# Altium PCB CC2530-Module.PcbDoc
Units mil, origin at the board's own origin, x right, y up, seen from the top; angles counter-clockwise.
Board outline 1300 x 1295 mil, 2 copper layers (Top Layer, Bottom Layer); 12 components, 30 nets, 94 pads, 20 vias.
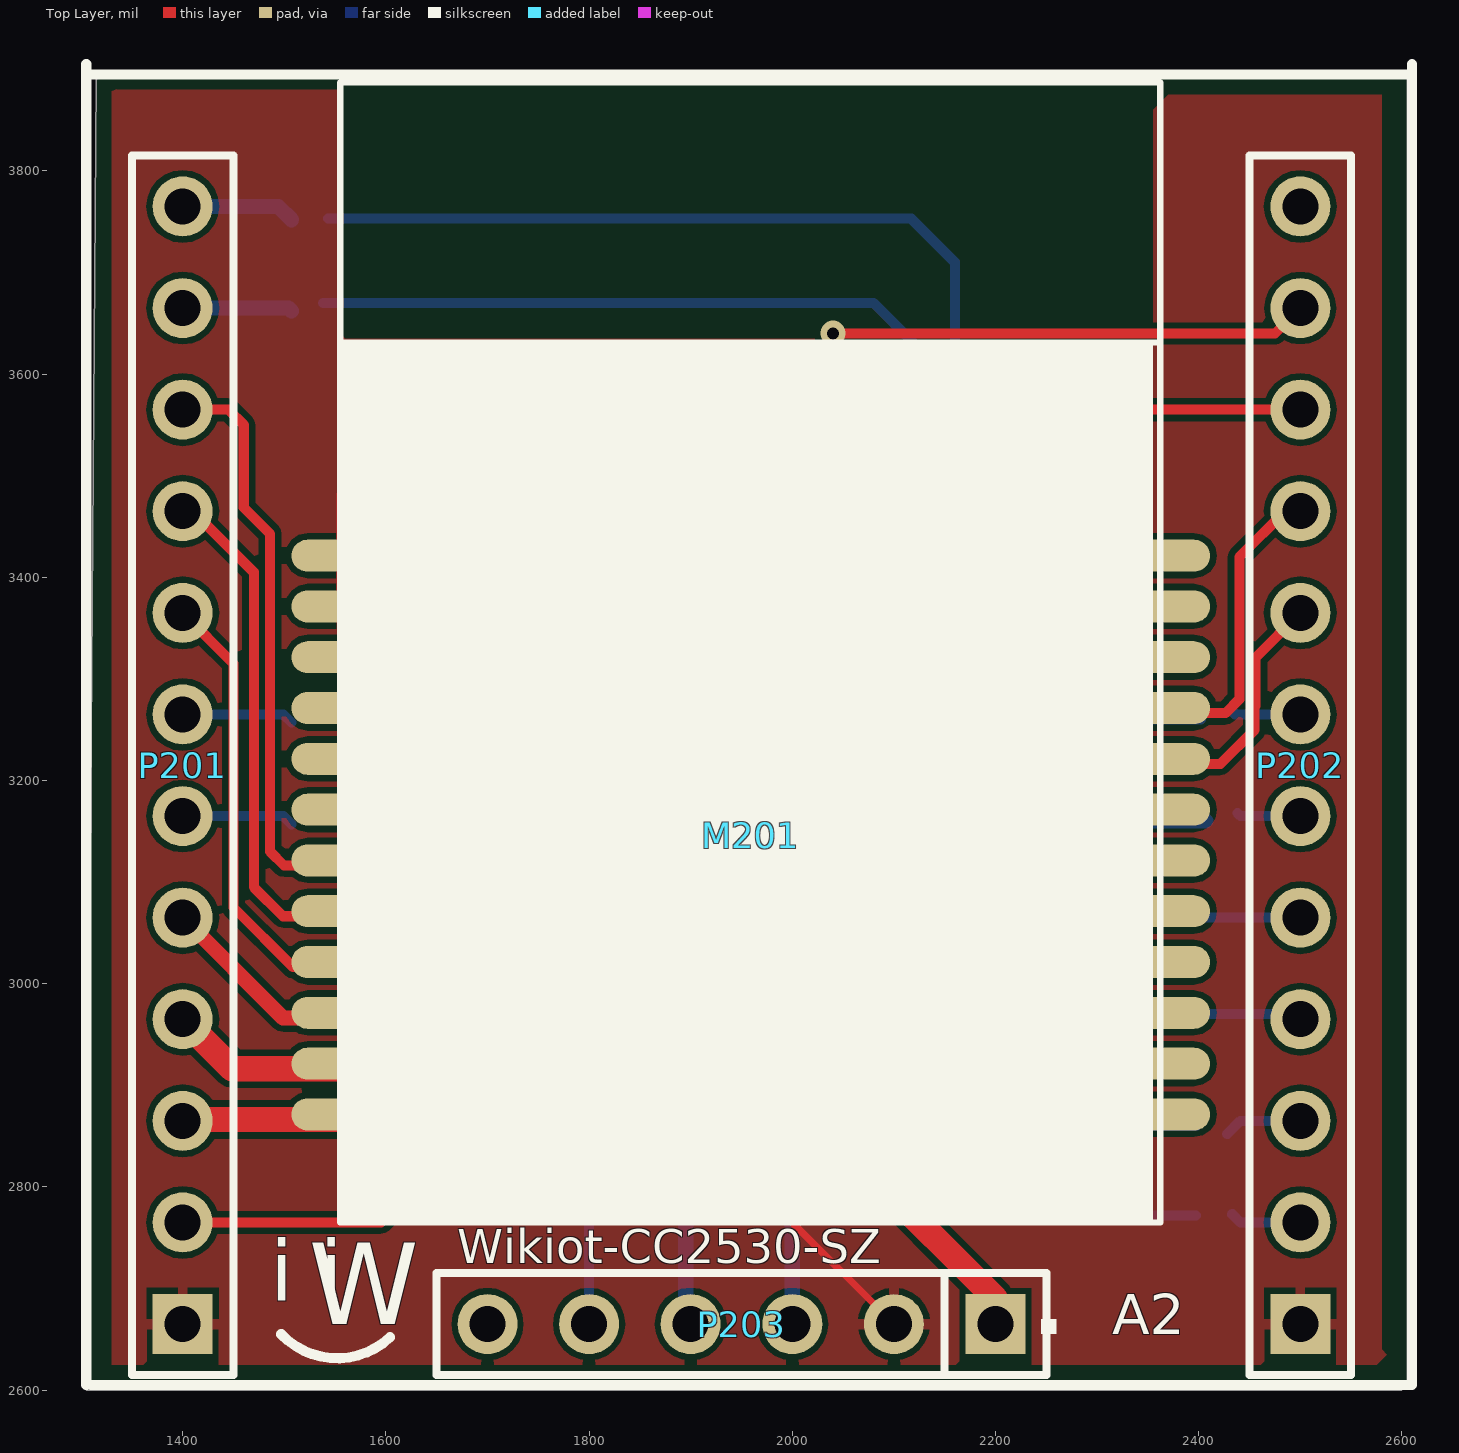
[diagram p0: Top Layer view]
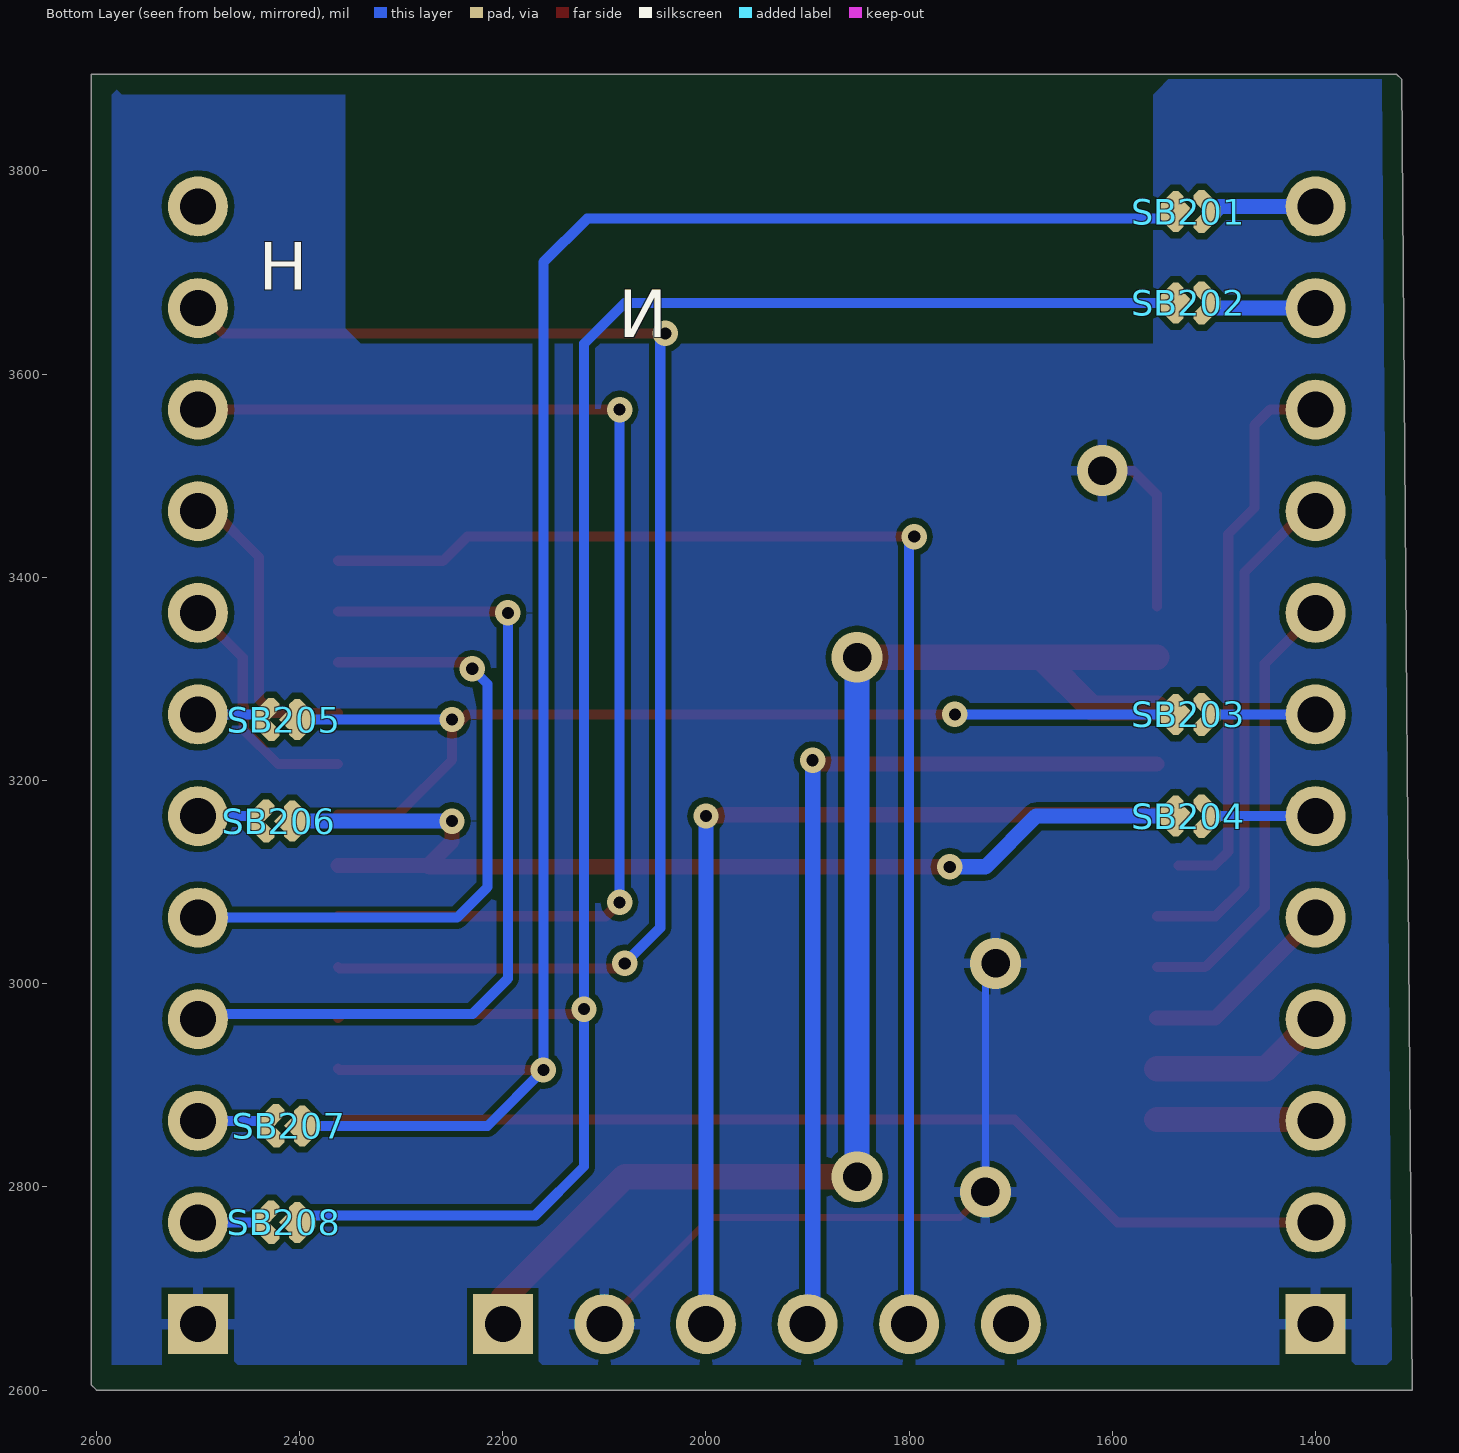
[diagram p1: Bottom Layer view, seen from below]

## Layer stack, top to bottom
Top Solder: solder mask 0.4, Solder Resist, Dk 3.5
Top Layer: signal copper 1.4
Dielectric1: dielectric 12.6, FR-4, Dk 4.8
Bottom Layer: signal copper 1.4
Bottom Solder: solder mask 0.4, Solder Resist, Dk 3.5

## Board outline
1315,3890 1320,3895 2605,3895 2605,2605 2600,2600 1305,2600

## Design rules (kind name [scope] priority, off if disabled: settings)
Clearance [All] p1: gap=6
PolygonConnect [All] p1: connectstyle=Relief reliefconductorwidth=10 reliefentries=4 polygonreliefangle="90 Angle" airgapwidth=10
RoomDefinition CC2530-Module [InComponentClass('CC2530-Module')] p1: confinementstyle=ConfineIn formatcopy=TRUE lockcomponents=FALSE outline 1315,2585 2620,2585 2620,3900 1315,3900
RoutingVias [All] p1: holewidth=12 width=25 viastyle="Through Hole" minholewidth=12 minwidth=25 maxholewidth=28 maxwidth=50
SolderMaskExpansion [All] p1: expansion=4
Width [All] p1: maxlimit=55 minlimit=7 preferedwidth=10
29 further rules are at their usual default settings.

## Components (designator, comment, footprint, x,y, rotation, side; value= is the part's Value field where it differs from the comment)
M201 "CC2530 SZ1" CC2530-SMT 1555,2765 r0 top
P201 "Synio Header-L 12-Pin" HDR1X12 1400,2665 r90 top
P202 "Synio Header-R 12-Pin" HDR1X12 2500,2665 r90 top
P203 "Synio Power Header 6 Pin" HDR1X6/2.54MM 2200,2665 r180 top
SB201 "Circuit Breaker" JP2_SMD 1525,3760 r0 bottom
SB202 "Circuit Breaker" JP2_SMD 1525,3670 r0 bottom
SB203 "Circuit Breaker" JP2_SMD 1525,3265 r0 bottom
SB204 "Circuit Breaker" JP2_SMD 1525,3165 r0 bottom
SB205 "Circuit Breaker" JP2_SMD 2415,3260 r180 bottom
SB206 "Circuit Breaker" JP2_SMD 2420,3160 r180 bottom
SB207 "Circuit Breaker" JP2_SMD 2410,2860 r180 bottom
SB208 "Circuit Breaker" JP2_SMD 2415,2765 r180 bottom

## Footprints (in the part's own frame and the unit in brackets; to place one, negate y for a bottom-side part, rotate by r counter-clockwise, add the part's x,y. Pads: shape width x height; smd on the part's side, far side on the other; paste and mask are expansions set on the pad)
CC2530-SMT [mm]
  oval 2.5x0.8 smd: 1(0.031,16.67) 2(0.031,15.4) 3(0.031,14.13) 4(0.031,12.86) 5(0.031,11.59) 6(0.031,10.32) 7(0.031,9.05) 8(0.031,7.78) 9(0.031,6.51) 10(0.031,5.24) 11(0.031,3.97) 12(0.031,2.7) 13(20.5,2.7) 14(20.5,3.97) 15(20.5,5.24) 16(20.5,6.51) 17(20.5,7.78) 18(20.5,9.05) 19(20.5,10.32) 20(20.5,11.59) 21(20.5,12.86) 22(20.5,14.13) 23(20.5,15.4) 24(20.5,16.67)
  silkscreen extent 0,0 20.5,28.5
HDR1X6/2.54MM [mm] "Connector; Header; 6 Position"
  rect 1.5x1.5 hole 0.9: 1(0,0)
  round 1.5 hole 0.9: 2(2.54,0) 3(5.08,0) 4(7.62,0) 5(10.16,0) 6(12.7,0)
  silkscreen extent -1.52,-1.27 13.97,1.27
HDR1X12 [mm] "Connector; Header; 12 Position"
  rect 1.5x1.5 hole 0.9: 1(0,0)
  round 1.5 hole 0.9: 2(2.54,0) 3(5.08,0) 4(7.62,0) 5(10.16,0) 6(12.7,0) 7(15.24,0) 8(17.78,0) 9(20.32,0) 10(22.86,0) 11(25.4,0) 12(27.94,0)
  silkscreen extent -1.27,-1.27 29.21,1.27
JP2_SMD [mil]
  oct 15x30 smd rot 45: 1(-18,-8) 2(18,7)
  oct 15.75x30 smd rot 135: 1(-18,8)
  rect 26x26 smd rot 45: 2(13,0)
  oct 15x30 smd rot 135: 2(18,-7)

## Part data
M201: "CC2530 SZ1 Module"
P201: "Synio Header-L, 12-Pin"
P202: "Synio Header-R, 12-Pin"

## Via types
v1: diameter 25, hole 12, Top Layer to Bottom Layer, 15 vias
v2: diameter 50, hole 28, Top Layer to Bottom Layer, 5 vias

## Nets (pads, with @x,y where several pads share a name; then routed paths per layer and width w, separated by ;. In a path a pad name is that pad's centre, name@x,y a point inside that pad or via, vN(x,y) a via of type N, cw(c..) or ccw(c..) an arc to the next point about the centre after c; other vN are vias at no path point)
D3V3: M201.3 M201.4 P203.1 | length 1364.3
  Top Layer w25: M201.4 1620,3271.3 1670,3321.3 ; M201.3 1670,3321.3 ; v2(1851.3,2810) 2080,2810 2200,2690 P203.1 ; v2(1851.3,3321.3) 1670,3321.3
  Bottom Layer w25: v2(1851.3,2810) v2(1851.3,3321.3)
GND: M201.1 M201.2 P201.1 P202.1 P203.2 | length 831.5
  Top Layer w7: v2(1725,2795) 1750,2770 1995,2770 P203.2
  Top Layer w10: M201.2 M201.1 1556.23,3481.23 1580,3505 v2(1610,3505)
  Bottom Layer w7: v2(1715,3020) 1725,3010 v2(1725,2795)
NetP201_6: P201.6 SB204.1 | length 110.3
  Bottom Layer w10: P201.6 1499,3165 SB204.1@1507,3157
NetP201_7: P201.7 SB203.1 | length 110.3
  Bottom Layer w10: P201.7 1499,3265 SB203.1@1507,3257
NetP201_11: P201.11 SB202.1 | length 108.2
  Bottom Layer w15: P201.11 1504,3665 SB202.1@1507,3662
NetP201_12: P201.12 SB201.1 | length 112.4
  Bottom Layer w15: P201.12 1494,3765 SB201.1@1507,3752
NetP202_2: P202.2 SB208.1 | length 70.3
  Bottom Layer w10: SB208.1@2433,2773 2441,2765 P202.2
NetP202_3: P202.3 SB207.1 | length 77.4
  Bottom Layer w10: SB207.1@2428,2852 2441,2865 P202.3
NetP202_6: P202.6 SB206.1 | length 63.2
  Bottom Layer w10: SB206.1@2438,3168 2441,3165 P202.6
NetP202_7: P202.7 SB205.1 | length 68.2
  Bottom Layer w10: SB205.1@2433,3268 2436,3265 P202.7
NRST: M201.24 P203.5 | length 1354
  Top Layer w10: v1(1795,3440) 2235,3440 2258.7,3416.3 M201.24@2362.09,3416.3
  Bottom Layer w10: v1(1795,3440) 1800,3435 P203.5
P0.0/AIN0: M201.23 P202.4 | length 859.2
  Top Layer w10: v1(2195,3365) 2190,3365 2191.3,3366.3 M201.23@2362.09,3366.3
  Bottom Layer w10: v1(2195,3365) 2195,3005 2230,2970 2495,2970 P202.4
P0.1/AIN1: M201.22 P202.5 | length 653.3
  Top Layer w10: v1(2230,3310) 2236.3,3316.3 M201.22@2362.09,3316.3
  Bottom Layer w10: v1(2230,3310) 2215,3295 2215,3095 2245,3065 P202.5
P0.2/AIN2/RX1: M201.21 P202.9 | length 302.2
  Top Layer w10: M201.21@2362.09,3266.3 2426.3,3266.3 2440,3280 2440,3420 2485,3465 P202.9
P0.3/AIN3/TX1: M201.20 P202.8 | length 240.5
  Top Layer w10: M201.20@2362.09,3216.3 2421.3,3216.3 2455,3250 2455,3272.37 2456,3273.37 2456,3321 P202.8
P0.4/AIN4/CTS1: M201.19 SB203.2 SB205.2 | length 1036.6
  Top Layer w10: v1(1755,3265) 2235,3265 2250,3250 2250,3220 2303.7,3166.3 M201.19@2362.09,3166.3
  Bottom Layer w10: SB203.2@1538,3265 1750,3265 v1@1755,3270 ; v1(2250,3260) SB205.2@2402,3260
P0.5/AIN5/RTS1: M201.18 SB204.2 SB206.2 | length 1055.9
  Top Layer w15: v1(1760,3115) 2272.4,3115 2273.7,3116.3 ; v1(2250,3160) 2250,3140 2273.7,3116.3 ; M201.18@2362.09,3116.3 2273.7,3116.3
  Bottom Layer w15: SB204.2@1538,3165 1675,3165 1725,3115 v1(1760,3115) ; v1(2250,3160) SB206.2@2407,3160
P0.6/AIN6: M201.17 P202.10 | length 1182.8
  Top Layer w10: v1(2085,3080) 2098.7,3066.3 M201.17@2362.09,3066.3 ; v1(2085,3565) P202.10
  Bottom Layer w10: v1(2085,3080) v1(2085,3565)
P0.7/AIN7: M201.16 P202.11 | length 1391.6
  Top Layer w10: v1(2040,3640) 2475,3640 P202.11 ; v1(2080,3020) 2085,3015 2360.79,3015 M201.16@2362.09,3016.3
  Bottom Layer w10: v1(2040,3640) 2045,3635 2045,3055 v1(2080,3020)
P1.0/T0: M201.15 SB202.2 SB208.2 | length 1951.1
  Top Layer w10: v1(2120,2975) 2125,2970 2358.39,2970 M201.15@2362.09,2966.3
  Bottom Layer w10: SB202.2@1538,3670 2080,3670 2120,3630 v1(2120,2975) 2120,2820 2168,2772 SB208.2@2397,2772
P1.1/T1: M201.14 SB201.2 SB207.2 | length 1892.2
  Top Layer w10: v1(2160,2915) 2360.79,2915 M201.14@2362.09,2916.3
  Bottom Layer w10: SB201.2@1543,3753 2117,3753 2160,3710 v1(2160,2915) 2215,2860 SB207.2@2397,2860
P1.2/SS: M201.13 P201.2 | length 1004
  Top Layer w10: P201.2 1595,2765 1696.3,2866.3 M201.13@2362.09,2866.3
P1.3/SCK: M201.12 P201.3 | length 156.8
  Top Layer w25: P201.3 1401.3,2866.3 M201.12@1556.23,2866.3
P1.4/MISO: M201.11 P201.4 | length 176.4
  Top Layer w25: P201.4 1448.7,2916.3 M201.11@1556.23,2916.3
P1.5/MOSI: M201.10 P201.5 | length 197.1
  Top Layer w15: P201.5 1498.7,2966.3 M201.10@1556.23,2966.3
P1.6/TX0: M201.9 P201.8 | length 441.3
  Top Layer w10: P201.8 1450,3315 1450,3075 1508.7,3016.3 M201.9@1556.23,3016.3
P1.7/RX0: M201.8 P201.9 | length 503
  Top Layer w10: P201.9 1410,3465 1470,3405 1470,3095 1498.7,3066.3 M201.8@1556.23,3066.3
P2.0: M201.7 P201.10 | length 551.6
  Top Layer w10: P201.10 1445,3565 1460,3550 1460,3468.63 1486,3442.63 1486,3130 1499.7,3116.3 M201.7@1534.94,3116.3
P2.1/DD: M201.6 P203.3 | length 944.3
  Top Layer w15: M201.6@1556.23,3166.3 1983.7,3166.3 1985,3165 v1(2000,3165)
  Bottom Layer w15: P203.3 v1(2000,3165)
P2.2/DC: M201.5 P203.4 | length 897.4
  Top Layer w15: M201.5@1556.23,3216.3 1891.3,3216.3 v1(1895,3220)
  Bottom Layer w15: v1(1895,3220) 1895,2670 P203.4
pads on no net: P202.12 P203.6

## Polygon pours and split planes (outlines as drawn)
GND on Bottom Layer "Top Layer-No Net" (solid, remove dead copper, pour order 51): 1335,3890 1545,3890 1555,3880 1560,3875 1560,3630 2340,3630 2350,3640 2355,3645 2355,3875 2575,3875 2580,3880 2585,3875 2585,2625 1330,2625 1325,2630
GND on Top Layer "Top Layer-No Net" (solid, remove dead copper, pour order 43): 1330,3885 1335,3880 1555,3880 1555,3640 1560,3635 2355,3635 2355,3860 2365,3870 2370,3875 2580,3875 2580,2640 2585,2635 2575,2625 1330,2625

## Silkscreen, mask and mechanical layers (free items; w line width, h text height)
Top Overlay:
  rectangle: 1555,2765 2355,3631.14
  lines w10: 1305,2605 1305,3905 ; 1310,2605 2610,2605 2610,3905 ; 1310,3895 2610,3895 ; 1497,2655 ccw(c1552,2707) 1604,2652
  text "Wikiot-CC2530-SZ" at 1670,2725 h33.46
  text "i i" at 1486,2688 h60
  text "W" at 1524,2665 h80
  text "A2" at 2315,2655 h39.37
Bottom Overlay:
  text "H" at 2440,3668 h80
  text "N" at 2038,3621 h80